# EAGLE board 10-19-21_LEDSubMatrixHighDensity (EAGLE 9.6.2)
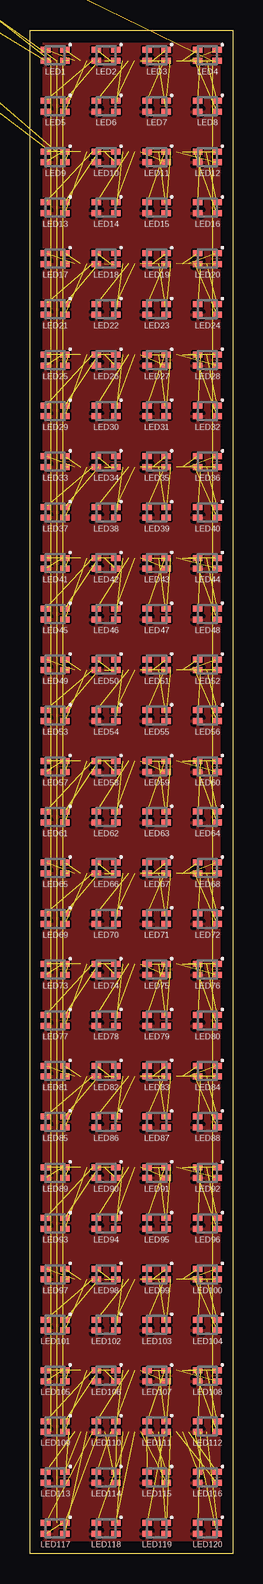
[diagram p0: board, top side]
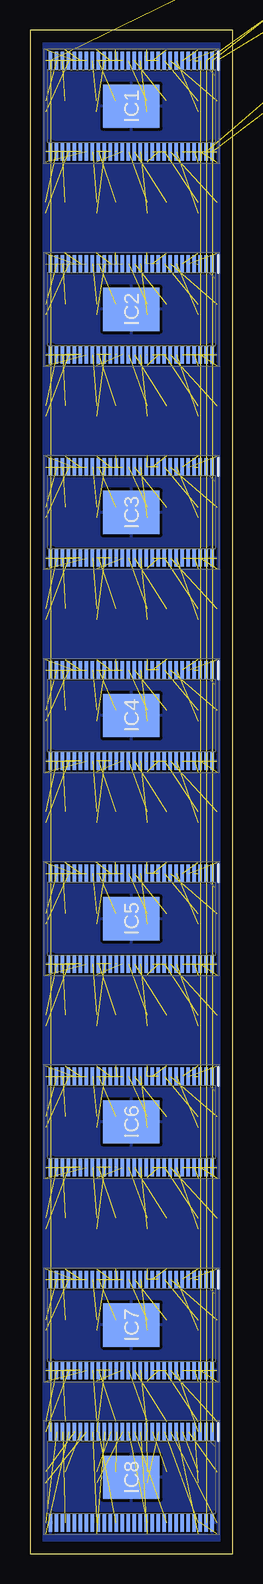
[diagram p1: board, bottom side, seen from below]

Size 16.93 x 127 mm. Coordinates in mm from the lower left corner, seen from the top.
Outline: 0,127 16.93,127 16.93,0 0,0 0,127
Copper layers (1+2*15+16): Top 0.035mm / dielectric 0.2mm / InnerTop 0.0175mm / dielectric 1.065mm / InnerBottom 0.0175mm / dielectric 0.2mm / Bottom 0.035mm
Design rules "default *": minimum track width 6mil, minimum drill 0.35mm, track to track 6mil, track to pad 6mil, pad to pad 6mil, via to via 6mil, smd to smd 6mil, copper to edge 40mil, drill to drill 6mil, minimum pad ring 10mil, minimum via ring 8mil, stop-mask expansion 4mil, vias tented up to drill 0mil, thermal gap 10mil

## Footprints (pad centres in the part's own frame; a part is rotated, then mirrored left to right if it is on the bottom)
SOP50P810X120-57N = smd 1.475 x 0.3: 1 -3.788,6.75; 2 -3.788,6.25; 3 -3.788,5.75; 4 -3.788,5.25; 5 -3.788,4.75; 6 -3.788,4.25; 7 -3.788,3.75; 8 -3.788,3.25; 9 -3.788,2.75; 10 -3.788,2.25; 11 -3.788,1.75; 12 -3.788,1.25; 13 -3.788,0.75; 14 -3.788,0.25; 15 -3.788,-0.25; 16 -3.788,-0.75; 17 -3.788,-1.25; 18 -3.788,-1.75; 19 -3.788,-2.25; 20 -3.788,-2.75; 21 -3.788,-3.25; 22 -3.788,-3.75; 23 -3.788,-4.25; 24 -3.788,-4.75; 25 -3.788,-5.25; 26 -3.788,-5.75; 27 -3.788,-6.25; 28 -3.788,-6.75; 29 3.788,-6.75; 30 3.788,-6.25; 31 3.788,-5.75; 32 3.788,-5.25; 33 3.788,-4.75; 34 3.788,-4.25; 35 3.788,-3.75; 36 3.788,-3.25; 37 3.788,-2.75; 38 3.788,-2.25; 39 3.788,-1.75; 40 3.788,-1.25; 41 3.788,-0.75; 42 3.788,-0.25; 43 3.788,0.25; 44 3.788,0.75; 45 3.788,1.25; 46 3.788,1.75; 47 3.788,2.25; 48 3.788,2.75; 49 3.788,3.25; 50 3.788,3.75; 51 3.788,4.25; 52 3.788,4.75; 53 3.788,5.25; 54 3.788,5.75; 55 3.788,6.25; 56 3.788,6.75 | smd 3.61 x 4.7: 57 0,0
B38G3RGB = smd 0.8 x 0.5: 1 0.8,0.45; 2 0.8,-0.45; 3 -0.8,-0.45; 4 -0.8,0.45
MA04-2 = drill 1.016 octagon: 1 -3.81,-1.27; 2 -3.81,1.27; 3 -1.27,-1.27; 4 -1.27,1.27; 5 1.27,-1.27; 6 1.27,1.27; 7 3.81,-1.27; 8 3.81,1.27

## Placement (x,y rotation side)
IC1  TLC5955DCAR  [SOP50P810X120-57N]  8.47,120.65 270 bottom
IC2  TLC5955DCAR  [SOP50P810X120-57N]  8.47,103.72 270 bottom
IC3  TLC5955DCAR  [SOP50P810X120-57N]  8.47,86.78 270 bottom
IC4  TLC5955DCAR  [SOP50P810X120-57N]  8.47,69.85 270 bottom
IC5  TLC5955DCAR  [SOP50P810X120-57N]  8.47,52.92 270 bottom
IC6  TLC5955DCAR  [SOP50P810X120-57N]  8.47,35.98 270 bottom
IC7  TLC5955DCAR  [SOP50P810X120-57N]  8.47,19.05 270 bottom
IC8  TLC5955DCAR  [SOP50P810X120-57N]  8.47,6.35 270 bottom
LED1  B38G3RGB  [B38G3RGB]  2.12,124.88 0 top
LED2  B38G3RGB  [B38G3RGB]  6.35,124.88 0 top
LED3  B38G3RGB  [B38G3RGB]  10.58,124.88 0 top
LED4  B38G3RGB  [B38G3RGB]  14.82,124.88 0 top
LED5  B38G3RGB  [B38G3RGB]  2.12,120.65 0 top
LED6  B38G3RGB  [B38G3RGB]  6.35,120.65 0 top
LED7  B38G3RGB  [B38G3RGB]  10.58,120.65 0 top
LED8  B38G3RGB  [B38G3RGB]  14.82,120.65 0 top
LED9  B38G3RGB  [B38G3RGB]  2.12,116.42 0 top
LED10  B38G3RGB  [B38G3RGB]  6.35,116.42 0 top
LED11  B38G3RGB  [B38G3RGB]  10.58,116.42 0 top
LED12  B38G3RGB  [B38G3RGB]  14.82,116.42 0 top
LED13  B38G3RGB  [B38G3RGB]  2.12,112.18 0 top
LED14  B38G3RGB  [B38G3RGB]  6.35,112.18 0 top
LED15  B38G3RGB  [B38G3RGB]  10.58,112.18 0 top
LED16  B38G3RGB  [B38G3RGB]  14.82,112.18 0 top
LED17  B38G3RGB  [B38G3RGB]  2.12,107.95 0 top
LED18  B38G3RGB  [B38G3RGB]  6.35,107.95 0 top
LED19  B38G3RGB  [B38G3RGB]  10.58,107.95 0 top
LED20  B38G3RGB  [B38G3RGB]  14.82,107.95 0 top
LED21  B38G3RGB  [B38G3RGB]  2.12,103.72 0 top
LED22  B38G3RGB  [B38G3RGB]  6.35,103.72 0 top
LED23  B38G3RGB  [B38G3RGB]  10.58,103.72 0 top
LED24  B38G3RGB  [B38G3RGB]  14.82,103.72 0 top
LED25  B38G3RGB  [B38G3RGB]  2.12,99.48 0 top
LED26  B38G3RGB  [B38G3RGB]  6.35,99.48 0 top
LED27  B38G3RGB  [B38G3RGB]  10.58,99.48 0 top
LED28  B38G3RGB  [B38G3RGB]  14.82,99.48 0 top
LED29  B38G3RGB  [B38G3RGB]  2.12,95.25 0 top
LED30  B38G3RGB  [B38G3RGB]  6.35,95.25 0 top
LED31  B38G3RGB  [B38G3RGB]  10.58,95.25 0 top
LED32  B38G3RGB  [B38G3RGB]  14.82,95.25 0 top
LED33  B38G3RGB  [B38G3RGB]  2.12,91.02 0 top
LED34  B38G3RGB  [B38G3RGB]  6.35,91.02 0 top
LED35  B38G3RGB  [B38G3RGB]  10.58,91.02 0 top
LED36  B38G3RGB  [B38G3RGB]  14.82,91.02 0 top
LED37  B38G3RGB  [B38G3RGB]  2.12,86.78 0 top
LED38  B38G3RGB  [B38G3RGB]  6.35,86.78 0 top
LED39  B38G3RGB  [B38G3RGB]  10.58,86.78 0 top
LED40  B38G3RGB  [B38G3RGB]  14.82,86.78 0 top
LED41  B38G3RGB  [B38G3RGB]  2.12,82.55 0 top
LED42  B38G3RGB  [B38G3RGB]  6.35,82.55 0 top
LED43  B38G3RGB  [B38G3RGB]  10.58,82.55 0 top
LED44  B38G3RGB  [B38G3RGB]  14.82,82.55 0 top
LED45  B38G3RGB  [B38G3RGB]  2.12,78.32 0 top
LED46  B38G3RGB  [B38G3RGB]  6.35,78.32 0 top
LED47  B38G3RGB  [B38G3RGB]  10.58,78.32 0 top
LED48  B38G3RGB  [B38G3RGB]  14.82,78.32 0 top
LED49  B38G3RGB  [B38G3RGB]  2.12,74.08 0 top
LED50  B38G3RGB  [B38G3RGB]  6.35,74.08 0 top
LED51  B38G3RGB  [B38G3RGB]  10.58,74.08 0 top
LED52  B38G3RGB  [B38G3RGB]  14.82,74.08 0 top
LED53  B38G3RGB  [B38G3RGB]  2.12,69.85 0 top
LED54  B38G3RGB  [B38G3RGB]  6.35,69.85 0 top
LED55  B38G3RGB  [B38G3RGB]  10.58,69.85 0 top
LED56  B38G3RGB  [B38G3RGB]  14.82,69.85 0 top
LED57  B38G3RGB  [B38G3RGB]  2.12,65.62 0 top
LED58  B38G3RGB  [B38G3RGB]  6.35,65.62 0 top
LED59  B38G3RGB  [B38G3RGB]  10.58,65.62 0 top
LED60  B38G3RGB  [B38G3RGB]  14.82,65.62 0 top
LED61  B38G3RGB  [B38G3RGB]  2.12,61.38 0 top
LED62  B38G3RGB  [B38G3RGB]  6.35,61.38 0 top
LED63  B38G3RGB  [B38G3RGB]  10.58,61.38 0 top
LED64  B38G3RGB  [B38G3RGB]  14.82,61.38 0 top
LED65  B38G3RGB  [B38G3RGB]  2.12,57.15 0 top
LED66  B38G3RGB  [B38G3RGB]  6.35,57.15 0 top
LED67  B38G3RGB  [B38G3RGB]  10.58,57.15 0 top
LED68  B38G3RGB  [B38G3RGB]  14.82,57.15 0 top
LED69  B38G3RGB  [B38G3RGB]  2.12,52.92 0 top
LED70  B38G3RGB  [B38G3RGB]  6.35,52.92 0 top
LED71  B38G3RGB  [B38G3RGB]  10.58,52.92 0 top
LED72  B38G3RGB  [B38G3RGB]  14.82,52.92 0 top
LED73  B38G3RGB  [B38G3RGB]  2.12,48.68 0 top
LED74  B38G3RGB  [B38G3RGB]  6.35,48.68 0 top
LED75  B38G3RGB  [B38G3RGB]  10.58,48.68 0 top
LED76  B38G3RGB  [B38G3RGB]  14.82,48.68 0 top
LED77  B38G3RGB  [B38G3RGB]  2.12,44.45 0 top
LED78  B38G3RGB  [B38G3RGB]  6.35,44.45 0 top
LED79  B38G3RGB  [B38G3RGB]  10.58,44.45 0 top
LED80  B38G3RGB  [B38G3RGB]  14.82,44.45 0 top
LED81  B38G3RGB  [B38G3RGB]  2.12,40.22 0 top
LED82  B38G3RGB  [B38G3RGB]  6.35,40.22 0 top
LED83  B38G3RGB  [B38G3RGB]  10.58,40.22 0 top
LED84  B38G3RGB  [B38G3RGB]  14.82,40.22 0 top
LED85  B38G3RGB  [B38G3RGB]  2.12,35.98 0 top
LED86  B38G3RGB  [B38G3RGB]  6.35,35.98 0 top
LED87  B38G3RGB  [B38G3RGB]  10.58,35.98 0 top
LED88  B38G3RGB  [B38G3RGB]  14.82,35.98 0 top
LED89  B38G3RGB  [B38G3RGB]  2.12,31.75 0 top
LED90  B38G3RGB  [B38G3RGB]  6.35,31.75 0 top
LED91  B38G3RGB  [B38G3RGB]  10.58,31.75 0 top
LED92  B38G3RGB  [B38G3RGB]  14.82,31.75 0 top
LED93  B38G3RGB  [B38G3RGB]  2.12,27.52 0 top
LED94  B38G3RGB  [B38G3RGB]  6.35,27.52 0 top
LED95  B38G3RGB  [B38G3RGB]  10.58,27.52 0 top
LED96  B38G3RGB  [B38G3RGB]  14.82,27.52 0 top
LED97  B38G3RGB  [B38G3RGB]  2.12,23.28 0 top
LED98  B38G3RGB  [B38G3RGB]  6.35,23.28 0 top
LED99  B38G3RGB  [B38G3RGB]  10.58,23.28 0 top
LED100  B38G3RGB  [B38G3RGB]  14.82,23.28 0 top
LED101  B38G3RGB  [B38G3RGB]  2.12,19.05 0 top
LED102  B38G3RGB  [B38G3RGB]  6.35,19.05 0 top
LED103  B38G3RGB  [B38G3RGB]  10.58,19.05 0 top
LED104  B38G3RGB  [B38G3RGB]  14.82,19.05 0 top
LED105  B38G3RGB  [B38G3RGB]  2.12,14.82 0 top
LED106  B38G3RGB  [B38G3RGB]  6.35,14.82 0 top
LED107  B38G3RGB  [B38G3RGB]  10.58,14.82 0 top
LED108  B38G3RGB  [B38G3RGB]  14.82,14.82 0 top
LED109  B38G3RGB  [B38G3RGB]  2.12,10.58 0 top
LED110  B38G3RGB  [B38G3RGB]  6.35,10.58 0 top
LED111  B38G3RGB  [B38G3RGB]  10.58,10.58 0 top
LED112  B38G3RGB  [B38G3RGB]  14.82,10.58 0 top
LED113  B38G3RGB  [B38G3RGB]  2.12,6.35 0 top
LED114  B38G3RGB  [B38G3RGB]  6.35,6.35 0 top
LED115  B38G3RGB  [B38G3RGB]  10.58,6.35 0 top
LED116  B38G3RGB  [B38G3RGB]  14.82,6.35 0 top
LED117  B38G3RGB  [B38G3RGB]  2.12,2.12 0 top
LED118  B38G3RGB  [B38G3RGB]  6.35,2.12 0 top
LED119  B38G3RGB  [B38G3RGB]  10.58,2.12 0 top
LED120  B38G3RGB  [B38G3RGB]  14.82,2.12 0 top
SV1  [MA04-2]  -33.02,147.32 0 top  (outside the outline)

## Library data of the parts
IC1-IC8 = TLC5955DCAR; ARROW_PART_NUMBER: TLC5955DCAR; ARROW_PRICE-STOCK: https://www.arrow.com/en/products/tlc5955dcar/texas-instruments; DESCRIPTION: 48ch, 16bit PWM LED Driver with Dot-Correction, Brightness Control, Open/Short Detection; HEIGHT: 1.2mm; MANUFACTURER_NAME: Texas Instruments; MANUFACTURER_PART_NUMBER: TLC5955DCAR; MOUSER_PART_NUMBER: 595-TLC5955DCAR; MOUSER_PRICE-STOCK: https://www.mouser.co.uk/ProductDetail/Texas-Instruments/TLC5955DCAR?qs=%2Fd%252BFzHvH4c3zo%2FeGYG5n7g%3D%3D
LED1-LED120 = B38G3RGB; ARROW_PART_NUMBER: SML-LX0606IGC-TR; ARROW_PRICE-STOCK: https://www.arrow.com/en/products/sml-lx0606igc-tr/lumex; DESCRIPTION: Standard LEDs - SMD Surface Mount LEDs; HEIGHT: 0.7mm; MANUFACTURER_NAME: Lumex; MANUFACTURER_PART_NUMBER: SML-LX0606IGC-TR; MOUSER_PART_NUMBER: 696-SML-0606IGCTR; MOUSER_PRICE-STOCK: https://www.mouser.co.uk/ProductDetail/Lumex/SML-LX0606IGC-TR?qs=I1ILoAvtKy%252BVd7WFwiUkZQ%3D%3D
SV1 = con-lstb; OC_FARNELL: unknown; OC_NEWARK: unknown

## Nets
3V3: IC1.54 IC2.54 IC3.54 IC4.54 IC5.54 IC6.54 IC7.54 IC8.54 LED1.3 LED2.3 LED3.3 LED4.3 LED5.3 LED6.3 LED7.3 LED8.3 LED9.3 LED10.3 LED11.3 LED12.3 LED13.3 LED14.3 LED15.3 LED16.3 LED17.3 LED18.3 LED19.3 LED20.3 LED21.3 LED22.3 LED23.3 LED24.3 LED25.3 LED26.3 LED27.3 LED28.3 LED29.3 LED30.3 LED31.3 LED32.3 LED33.3 LED34.3 LED35.3 LED36.3 LED37.3 LED38.3 LED39.3 LED40.3 LED41.3 LED42.3 LED43.3 LED44.3 LED45.3 LED46.3 LED47.3 LED48.3 LED49.3 LED50.3 LED51.3 LED52.3 LED53.3 LED54.3 LED55.3 LED56.3 LED57.3 LED58.3 LED59.3 LED60.3 LED61.3 LED62.3 LED63.3 LED64.3 LED65.3 LED66.3 LED67.3 LED68.3 LED69.3 LED70.3 LED71.3 LED72.3 LED73.3 LED74.3 LED75.3 LED76.3 LED77.3 LED78.3 LED79.3 LED80.3 LED81.3 LED82.3 LED83.3 LED84.3 LED85.3 LED86.3 LED87.3 LED88.3 LED89.3 LED90.3 LED91.3 LED92.3 LED93.3 LED94.3 LED95.3 LED96.3 LED97.3 LED98.3 LED99.3 LED100.3 LED101.3 LED102.3 LED103.3 LED104.3 LED105.3 LED106.3 LED107.3 LED108.3 LED109.3 LED110.3 LED111.3 LED112.3 LED113.3 LED114.3 LED115.3 LED116.3 LED117.3 LED118.3 LED119.3 LED120.3 SV1.3 SV1.4
GND: IC1.29 IC1.56 IC1.57 IC2.29 IC2.56 IC2.57 IC3.29 IC3.56 IC3.57 IC4.29 IC4.56 IC4.57 IC5.29 IC5.56 IC5.57 IC6.29 IC6.56 IC6.57 IC7.29 IC7.56 IC7.57 IC8.29 IC8.56 IC8.57 SV1.1 SV1.2
GSCLK: IC1.55 IC2.55 IC3.55 IC4.55 IC5.55 IC6.55 IC7.55 IC8.55 SV1.5
LAT: IC1.3 IC2.3 IC3.3 IC4.3 IC5.3 IC6.3 IC7.3 IC8.3
N$352: IC8.53
N$353: IC8.52
N$354: IC8.51
N$355: IC8.50
N$356: IC8.49
N$357: IC8.48
N$358: IC8.47
N$359: IC8.46
N$360: IC8.45
N$361: IC8.44
N$362: IC8.43
N$363: IC8.42
N$364: IC8.41
N$365: IC8.40
N$366: IC8.39
N$367: IC8.38
N$368: IC8.37
N$369: IC8.36
N$370: IC8.35
N$371: IC8.34
N$372: IC8.33
N$373: IC8.32
N$374: IC8.31
N$375: IC8.30
N$LEDB1_IC1_PIN4: IC1.4 LED1.2
N$LEDB2_IC1_PIN10: IC1.10 LED2.2
N$LEDB3_IC1_PIN16: IC1.16 LED3.2
N$LEDB4_IC1_PIN22: IC1.22 LED4.2
N$LEDB5_IC1_PIN7: IC1.7 LED5.2
N$LEDB6_IC1_PIN13: IC1.13 LED6.2
N$LEDB7_IC1_PIN19: IC1.19 LED7.2
N$LEDB8_IC1_PIN25: IC1.25 LED8.2
N$LEDB9_IC1_PIN53: IC1.53 LED9.2
N$LEDB10_IC1_PIN47: IC1.47 LED10.2
N$LEDB11_IC1_PIN41: IC1.41 LED11.2
N$LEDB12_IC1_PIN35: IC1.35 LED12.2
N$LEDB13_IC1_PIN50: IC1.50 LED13.2
N$LEDB14_IC1_PIN44: IC1.44 LED14.2
N$LEDB15_IC1_PIN38: IC1.38 LED15.2
N$LEDB16_IC1_PIN32: IC1.32 LED16.2
N$LEDB17_IC2_PIN4: IC2.4 LED17.2
N$LEDB18_IC2_PIN10: IC2.10 LED18.2
N$LEDB19_IC2_PIN16: IC2.16 LED19.2
N$LEDB20_IC2_PIN22: IC2.22 LED20.2
N$LEDB21_IC2_PIN7: IC2.7 LED21.2
N$LEDB22_IC2_PIN13: IC2.13 LED22.2
N$LEDB23_IC2_PIN19: IC2.19 LED23.2
N$LEDB24_IC2_PIN25: IC2.25 LED24.2
N$LEDB25_IC2_PIN53: IC2.53 LED25.2
N$LEDB26_IC2_PIN47: IC2.47 LED26.2
N$LEDB27_IC2_PIN41: IC2.41 LED27.2
N$LEDB28_IC2_PIN35: IC2.35 LED28.2
N$LEDB29_IC2_PIN50: IC2.50 LED29.2
N$LEDB30_IC2_PIN44: IC2.44 LED30.2
N$LEDB31_IC2_PIN38: IC2.38 LED31.2
N$LEDB32_IC2_PIN32: IC2.32 LED32.2
N$LEDB33_IC3_PIN4: IC3.4 LED33.2
N$LEDB34_IC3_PIN10: IC3.10 LED34.2
N$LEDB35_IC3_PIN16: IC3.16 LED35.2
N$LEDB36_IC3_PIN22: IC3.22 LED36.2
N$LEDB37_IC3_PIN7: IC3.7 LED37.2
N$LEDB38_IC3_PIN13: IC3.13 LED38.2
N$LEDB39_IC3_PIN19: IC3.19 LED39.2
N$LEDB40_IC3_PIN25: IC3.25 LED40.2
N$LEDB41_IC3_PIN53: IC3.53 LED41.2
N$LEDB42_IC3_PIN47: IC3.47 LED42.2
N$LEDB43_IC3_PIN41: IC3.41 LED43.2
N$LEDB44_IC3_PIN35: IC3.35 LED44.2
N$LEDB45_IC3_PIN50: IC3.50 LED45.2
N$LEDB46_IC3_PIN44: IC3.44 LED46.2
N$LEDB47_IC3_PIN38: IC3.38 LED47.2
N$LEDB48_IC3_PIN32: IC3.32 LED48.2
N$LEDB49_IC4_PIN4: IC4.4 LED49.2
N$LEDB50_IC4_PIN10: IC4.10 LED50.2
N$LEDB51_IC4_PIN16: IC4.16 LED51.2
N$LEDB52_IC4_PIN22: IC4.22 LED52.2
N$LEDB53_IC4_PIN7: IC4.7 LED53.2
N$LEDB54_IC4_PIN13: IC4.13 LED54.2
N$LEDB55_IC4_PIN19: IC4.19 LED55.2
N$LEDB56_IC4_PIN25: IC4.25 LED56.2
N$LEDB57_IC4_PIN53: IC4.53 LED57.2
N$LEDB58_IC4_PIN47: IC4.47 LED58.2
N$LEDB59_IC4_PIN41: IC4.41 LED59.2
N$LEDB60_IC4_PIN35: IC4.35 LED60.2
N$LEDB61_IC4_PIN50: IC4.50 LED61.2
N$LEDB62_IC4_PIN44: IC4.44 LED62.2
N$LEDB63_IC4_PIN38: IC4.38 LED63.2
N$LEDB64_IC4_PIN32: IC4.32 LED64.2
N$LEDB65_IC5_PIN4: IC5.4 LED65.2
N$LEDB66_IC5_PIN10: IC5.10 LED66.2
N$LEDB67_IC5_PIN16: IC5.16 LED67.2
N$LEDB68_IC5_PIN22: IC5.22 LED68.2
N$LEDB69_IC5_PIN7: IC5.7 LED69.2
N$LEDB70_IC5_PIN13: IC5.13 LED70.2
N$LEDB71_IC5_PIN19: IC5.19 LED71.2
N$LEDB72_IC5_PIN25: IC5.25 LED72.2
N$LEDB73_IC5_PIN53: IC5.53 LED73.2
N$LEDB74_IC5_PIN47: IC5.47 LED74.2
N$LEDB75_IC5_PIN41: IC5.41 LED75.2
N$LEDB76_IC5_PIN35: IC5.35 LED76.2
N$LEDB77_IC5_PIN50: IC5.50 LED77.2
N$LEDB78_IC5_PIN44: IC5.44 LED78.2
N$LEDB79_IC5_PIN38: IC5.38 LED79.2
N$LEDB80_IC5_PIN32: IC5.32 LED80.2
N$LEDB81_IC6_PIN4: IC6.4 LED81.2
N$LEDB82_IC6_PIN10: IC6.10 LED82.2
N$LEDB83_IC6_PIN16: IC6.16 LED83.2
N$LEDB84_IC6_PIN22: IC6.22 LED84.2
N$LEDB85_IC6_PIN7: IC6.7 LED85.2
N$LEDB86_IC6_PIN13: IC6.13 LED86.2
N$LEDB87_IC6_PIN19: IC6.19 LED87.2
N$LEDB88_IC6_PIN25: IC6.25 LED88.2
N$LEDB89_IC6_PIN53: IC6.53 LED89.2
N$LEDB90_IC6_PIN47: IC6.47 LED90.2
N$LEDB91_IC6_PIN41: IC6.41 LED91.2
N$LEDB92_IC6_PIN35: IC6.35 LED92.2
N$LEDB93_IC6_PIN50: IC6.50 LED93.2
N$LEDB94_IC6_PIN44: IC6.44 LED94.2
N$LEDB95_IC6_PIN38: IC6.38 LED95.2
N$LEDB96_IC6_PIN32: IC6.32 LED96.2
N$LEDB97_IC7_PIN4: IC7.4 LED97.2
N$LEDB98_IC7_PIN10: IC7.10 LED98.2
N$LEDB99_IC7_PIN16: IC7.16 LED99.2
N$LEDB100_IC7_PIN22: IC7.22 LED100.2
N$LEDB101_IC7_PIN7: IC7.7 LED101.2
N$LEDB102_IC7_PIN13: IC7.13 LED102.2
N$LEDB103_IC7_PIN19: IC7.19 LED103.2
N$LEDB104_IC7_PIN25: IC7.25 LED104.2
N$LEDB105_IC7_PIN53: IC7.53 LED105.2
N$LEDB106_IC7_PIN47: IC7.47 LED106.2
N$LEDB107_IC7_PIN41: IC7.41 LED107.2
N$LEDB108_IC7_PIN35: IC7.35 LED108.2
N$LEDB109_IC7_PIN50: IC7.50 LED109.2
N$LEDB110_IC7_PIN44: IC7.44 LED110.2
N$LEDB111_IC7_PIN38: IC7.38 LED111.2
N$LEDB112_IC7_PIN32: IC7.32 LED112.2
N$LEDB113_IC8_PIN4: IC8.4 LED113.2
N$LEDB114_IC8_PIN10: IC8.10 LED114.2
N$LEDB115_IC8_PIN16: IC8.16 LED115.2
N$LEDB116_IC8_PIN22: IC8.22 LED116.2
N$LEDB117_IC8_PIN7: IC8.7 LED117.2
N$LEDB118_IC8_PIN13: IC8.13 LED118.2
N$LEDB119_IC8_PIN19: IC8.19 LED119.2
N$LEDB120_IC8_PIN25: IC8.25 LED120.2
N$LEDG1_IC1_PIN6: IC1.6 LED1.1
N$LEDG2_IC1_PIN12: IC1.12 LED2.1
N$LEDG3_IC1_PIN18: IC1.18 LED3.1
N$LEDG4_IC1_PIN24: IC1.24 LED4.1
N$LEDG5_IC1_PIN9: IC1.9 LED5.1
N$LEDG6_IC1_PIN15: IC1.15 LED6.1
N$LEDG7_IC1_PIN21: IC1.21 LED7.1
N$LEDG8_IC1_PIN27: IC1.27 LED8.1
N$LEDG9_IC1_PIN51: IC1.51 LED9.1
N$LEDG10_IC1_PIN45: IC1.45 LED10.1
N$LEDG11_IC1_PIN39: IC1.39 LED11.1
N$LEDG12_IC1_PIN33: IC1.33 LED12.1
N$LEDG13_IC1_PIN48: IC1.48 LED13.1
N$LEDG14_IC1_PIN42: IC1.42 LED14.1
N$LEDG15_IC1_PIN36: IC1.36 LED15.1
N$LEDG16_IC1_PIN30: IC1.30 LED16.1
N$LEDG17_IC2_PIN6: IC2.6 LED17.1
N$LEDG18_IC2_PIN12: IC2.12 LED18.1
N$LEDG19_IC2_PIN18: IC2.18 LED19.1
N$LEDG20_IC2_PIN24: IC2.24 LED20.1
N$LEDG21_IC2_PIN9: IC2.9 LED21.1
N$LEDG22_IC2_PIN15: IC2.15 LED22.1
N$LEDG23_IC2_PIN21: IC2.21 LED23.1
N$LEDG24_IC2_PIN27: IC2.27 LED24.1
N$LEDG25_IC2_PIN51: IC2.51 LED25.1
N$LEDG26_IC2_PIN45: IC2.45 LED26.1
N$LEDG27_IC2_PIN39: IC2.39 LED27.1
N$LEDG28_IC2_PIN33: IC2.33 LED28.1
N$LEDG29_IC2_PIN48: IC2.48 LED29.1
N$LEDG30_IC2_PIN42: IC2.42 LED30.1
N$LEDG31_IC2_PIN36: IC2.36 LED31.1
N$LEDG32_IC2_PIN30: IC2.30 LED32.1
N$LEDG33_IC3_PIN6: IC3.6 LED33.1
N$LEDG34_IC3_PIN12: IC3.12 LED34.1
N$LEDG35_IC3_PIN18: IC3.18 LED35.1
N$LEDG36_IC3_PIN24: IC3.24 LED36.1
N$LEDG37_IC3_PIN9: IC3.9 LED37.1
N$LEDG38_IC3_PIN15: IC3.15 LED38.1
N$LEDG39_IC3_PIN21: IC3.21 LED39.1
N$LEDG40_IC3_PIN27: IC3.27 LED40.1
N$LEDG41_IC3_PIN51: IC3.51 LED41.1
N$LEDG42_IC3_PIN45: IC3.45 LED42.1
N$LEDG43_IC3_PIN39: IC3.39 LED43.1
N$LEDG44_IC3_PIN33: IC3.33 LED44.1
N$LEDG45_IC3_PIN48: IC3.48 LED45.1
N$LEDG46_IC3_PIN42: IC3.42 LED46.1
N$LEDG47_IC3_PIN36: IC3.36 LED47.1
N$LEDG48_IC3_PIN30: IC3.30 LED48.1
N$LEDG49_IC4_PIN6: IC4.6 LED49.1
N$LEDG50_IC4_PIN12: IC4.12 LED50.1
N$LEDG51_IC4_PIN18: IC4.18 LED51.1
N$LEDG52_IC4_PIN24: IC4.24 LED52.1
N$LEDG53_IC4_PIN9: IC4.9 LED53.1
N$LEDG54_IC4_PIN15: IC4.15 LED54.1
N$LEDG55_IC4_PIN21: IC4.21 LED55.1
N$LEDG56_IC4_PIN27: IC4.27 LED56.1
N$LEDG57_IC4_PIN51: IC4.51 LED57.1
N$LEDG58_IC4_PIN45: IC4.45 LED58.1
N$LEDG59_IC4_PIN39: IC4.39 LED59.1
N$LEDG60_IC4_PIN33: IC4.33 LED60.1
N$LEDG61_IC4_PIN48: IC4.48 LED61.1
N$LEDG62_IC4_PIN42: IC4.42 LED62.1
N$LEDG63_IC4_PIN36: IC4.36 LED63.1
N$LEDG64_IC4_PIN30: IC4.30 LED64.1
N$LEDG65_IC5_PIN6: IC5.6 LED65.1
N$LEDG66_IC5_PIN12: IC5.12 LED66.1
N$LEDG67_IC5_PIN18: IC5.18 LED67.1
N$LEDG68_IC5_PIN24: IC5.24 LED68.1
N$LEDG69_IC5_PIN9: IC5.9 LED69.1
N$LEDG70_IC5_PIN15: IC5.15 LED70.1
N$LEDG71_IC5_PIN21: IC5.21 LED71.1
N$LEDG72_IC5_PIN27: IC5.27 LED72.1
N$LEDG73_IC5_PIN51: IC5.51 LED73.1
N$LEDG74_IC5_PIN45: IC5.45 LED74.1
N$LEDG75_IC5_PIN39: IC5.39 LED75.1
N$LEDG76_IC5_PIN33: IC5.33 LED76.1
N$LEDG77_IC5_PIN48: IC5.48 LED77.1
N$LEDG78_IC5_PIN42: IC5.42 LED78.1
N$LEDG79_IC5_PIN36: IC5.36 LED79.1
N$LEDG80_IC5_PIN30: IC5.30 LED80.1
N$LEDG81_IC6_PIN6: IC6.6 LED81.1
N$LEDG82_IC6_PIN12: IC6.12 LED82.1
N$LEDG83_IC6_PIN18: IC6.18 LED83.1
N$LEDG84_IC6_PIN24: IC6.24 LED84.1
N$LEDG85_IC6_PIN9: IC6.9 LED85.1
N$LEDG86_IC6_PIN15: IC6.15 LED86.1
N$LEDG87_IC6_PIN21: IC6.21 LED87.1
N$LEDG88_IC6_PIN27: IC6.27 LED88.1
N$LEDG89_IC6_PIN51: IC6.51 LED89.1
N$LEDG90_IC6_PIN45: IC6.45 LED90.1
N$LEDG91_IC6_PIN39: IC6.39 LED91.1
N$LEDG92_IC6_PIN33: IC6.33 LED92.1
N$LEDG93_IC6_PIN48: IC6.48 LED93.1
N$LEDG94_IC6_PIN42: IC6.42 LED94.1
N$LEDG95_IC6_PIN36: IC6.36 LED95.1
N$LEDG96_IC6_PIN30: IC6.30 LED96.1
N$LEDG97_IC7_PIN6: IC7.6 LED97.1
N$LEDG98_IC7_PIN12: IC7.12 LED98.1
N$LEDG99_IC7_PIN18: IC7.18 LED99.1
N$LEDG100_IC7_PIN24: IC7.24 LED100.1
N$LEDG101_IC7_PIN9: IC7.9 LED101.1
N$LEDG102_IC7_PIN15: IC7.15 LED102.1
N$LEDG103_IC7_PIN21: IC7.21 LED103.1
N$LEDG104_IC7_PIN27: IC7.27 LED104.1
N$LEDG105_IC7_PIN51: IC7.51 LED105.1
N$LEDG106_IC7_PIN45: IC7.45 LED106.1
N$LEDG107_IC7_PIN39: IC7.39 LED107.1
N$LEDG108_IC7_PIN33: IC7.33 LED108.1
N$LEDG109_IC7_PIN48: IC7.48 LED109.1
N$LEDG110_IC7_PIN42: IC7.42 LED110.1
N$LEDG111_IC7_PIN36: IC7.36 LED111.1
N$LEDG112_IC7_PIN30: IC7.30 LED112.1
N$LEDG113_IC8_PIN6: IC8.6 LED113.1
N$LEDG114_IC8_PIN12: IC8.12 LED114.1
N$LEDG115_IC8_PIN18: IC8.18 LED115.1
N$LEDG116_IC8_PIN24: IC8.24 LED116.1
N$LEDG117_IC8_PIN9: IC8.9 LED117.1
N$LEDG118_IC8_PIN15: IC8.15 LED118.1
N$LEDG119_IC8_PIN21: IC8.21 LED119.1
N$LEDG120_IC8_PIN27: IC8.27 LED120.1
N$LEDR1_IC1_PIN5: IC1.5 LED1.4
N$LEDR2_IC1_PIN11: IC1.11 LED2.4
N$LEDR3_IC1_PIN17: IC1.17 LED3.4
N$LEDR4_IC1_PIN23: IC1.23 LED4.4
N$LEDR5_IC1_PIN8: IC1.8 LED5.4
N$LEDR6_IC1_PIN14: IC1.14 LED6.4
N$LEDR7_IC1_PIN20: IC1.20 LED7.4
N$LEDR8_IC1_PIN26: IC1.26 LED8.4
N$LEDR9_IC1_PIN52: IC1.52 LED9.4
N$LEDR10_IC1_PIN46: IC1.46 LED10.4
N$LEDR11_IC1_PIN40: IC1.40 LED11.4
N$LEDR12_IC1_PIN34: IC1.34 LED12.4
N$LEDR13_IC1_PIN49: IC1.49 LED13.4
N$LEDR14_IC1_PIN43: IC1.43 LED14.4
N$LEDR15_IC1_PIN37: IC1.37 LED15.4
N$LEDR16_IC1_PIN31: IC1.31 LED16.4
N$LEDR17_IC2_PIN5: IC2.5 LED17.4
N$LEDR18_IC2_PIN11: IC2.11 LED18.4
N$LEDR19_IC2_PIN17: IC2.17 LED19.4
N$LEDR20_IC2_PIN23: IC2.23 LED20.4
N$LEDR21_IC2_PIN8: IC2.8 LED21.4
N$LEDR22_IC2_PIN14: IC2.14 LED22.4
N$LEDR23_IC2_PIN20: IC2.20 LED23.4
N$LEDR24_IC2_PIN26: IC2.26 LED24.4
N$LEDR25_IC2_PIN52: IC2.52 LED25.4
N$LEDR26_IC2_PIN46: IC2.46 LED26.4
N$LEDR27_IC2_PIN40: IC2.40 LED27.4
N$LEDR28_IC2_PIN34: IC2.34 LED28.4
N$LEDR29_IC2_PIN49: IC2.49 LED29.4
N$LEDR30_IC2_PIN43: IC2.43 LED30.4
N$LEDR31_IC2_PIN37: IC2.37 LED31.4
N$LEDR32_IC2_PIN31: IC2.31 LED32.4
N$LEDR33_IC3_PIN5: IC3.5 LED33.4
N$LEDR34_IC3_PIN11: IC3.11 LED34.4
N$LEDR35_IC3_PIN17: IC3.17 LED35.4
N$LEDR36_IC3_PIN23: IC3.23 LED36.4
N$LEDR37_IC3_PIN8: IC3.8 LED37.4
N$LEDR38_IC3_PIN14: IC3.14 LED38.4
N$LEDR39_IC3_PIN20: IC3.20 LED39.4
N$LEDR40_IC3_PIN26: IC3.26 LED40.4
N$LEDR41_IC3_PIN52: IC3.52 LED41.4
N$LEDR42_IC3_PIN46: IC3.46 LED42.4
N$LEDR43_IC3_PIN40: IC3.40 LED43.4
N$LEDR44_IC3_PIN34: IC3.34 LED44.4
N$LEDR45_IC3_PIN49: IC3.49 LED45.4
N$LEDR46_IC3_PIN43: IC3.43 LED46.4
N$LEDR47_IC3_PIN37: IC3.37 LED47.4
N$LEDR48_IC3_PIN31: IC3.31 LED48.4
N$LEDR49_IC4_PIN5: IC4.5 LED49.4
N$LEDR50_IC4_PIN11: IC4.11 LED50.4
N$LEDR51_IC4_PIN17: IC4.17 LED51.4
N$LEDR52_IC4_PIN23: IC4.23 LED52.4
N$LEDR53_IC4_PIN8: IC4.8 LED53.4
N$LEDR54_IC4_PIN14: IC4.14 LED54.4
N$LEDR55_IC4_PIN20: IC4.20 LED55.4
N$LEDR56_IC4_PIN26: IC4.26 LED56.4
N$LEDR57_IC4_PIN52: IC4.52 LED57.4
N$LEDR58_IC4_PIN46: IC4.46 LED58.4
N$LEDR59_IC4_PIN40: IC4.40 LED59.4
N$LEDR60_IC4_PIN34: IC4.34 LED60.4
N$LEDR61_IC4_PIN49: IC4.49 LED61.4
N$LEDR62_IC4_PIN43: IC4.43 LED62.4
N$LEDR63_IC4_PIN37: IC4.37 LED63.4
N$LEDR64_IC4_PIN31: IC4.31 LED64.4
N$LEDR65_IC5_PIN5: IC5.5 LED65.4
N$LEDR66_IC5_PIN11: IC5.11 LED66.4
N$LEDR67_IC5_PIN17: IC5.17 LED67.4
N$LEDR68_IC5_PIN23: IC5.23 LED68.4
N$LEDR69_IC5_PIN8: IC5.8 LED69.4
N$LEDR70_IC5_PIN14: IC5.14 LED70.4
N$LEDR71_IC5_PIN20: IC5.20 LED71.4
N$LEDR72_IC5_PIN26: IC5.26 LED72.4
N$LEDR73_IC5_PIN52: IC5.52 LED73.4
N$LEDR74_IC5_PIN46: IC5.46 LED74.4
N$LEDR75_IC5_PIN40: IC5.40 LED75.4
N$LEDR76_IC5_PIN34: IC5.34 LED76.4
N$LEDR77_IC5_PIN49: IC5.49 LED77.4
N$LEDR78_IC5_PIN43: IC5.43 LED78.4
N$LEDR79_IC5_PIN37: IC5.37 LED79.4
N$LEDR80_IC5_PIN31: IC5.31 LED80.4
N$LEDR81_IC6_PIN5: IC6.5 LED81.4
N$LEDR82_IC6_PIN11: IC6.11 LED82.4
N$LEDR83_IC6_PIN17: IC6.17 LED83.4
N$LEDR84_IC6_PIN23: IC6.23 LED84.4
N$LEDR85_IC6_PIN8: IC6.8 LED85.4
N$LEDR86_IC6_PIN14: IC6.14 LED86.4
N$LEDR87_IC6_PIN20: IC6.20 LED87.4
N$LEDR88_IC6_PIN26: IC6.26 LED88.4
N$LEDR89_IC6_PIN52: IC6.52 LED89.4
N$LEDR90_IC6_PIN46: IC6.46 LED90.4
N$LEDR91_IC6_PIN40: IC6.40 LED91.4
N$LEDR92_IC6_PIN34: IC6.34 LED92.4
N$LEDR93_IC6_PIN49: IC6.49 LED93.4
N$LEDR94_IC6_PIN43: IC6.43 LED94.4
N$LEDR95_IC6_PIN37: IC6.37 LED95.4
N$LEDR96_IC6_PIN31: IC6.31 LED96.4
N$LEDR97_IC7_PIN5: IC7.5 LED97.4
N$LEDR98_IC7_PIN11: IC7.11 LED98.4
N$LEDR99_IC7_PIN17: IC7.17 LED99.4
N$LEDR100_IC7_PIN23: IC7.23 LED100.4
N$LEDR101_IC7_PIN8: IC7.8 LED101.4
N$LEDR102_IC7_PIN14: IC7.14 LED102.4
N$LEDR103_IC7_PIN20: IC7.20 LED103.4
N$LEDR104_IC7_PIN26: IC7.26 LED104.4
N$LEDR105_IC7_PIN52: IC7.52 LED105.4
N$LEDR106_IC7_PIN46: IC7.46 LED106.4
N$LEDR107_IC7_PIN40: IC7.40 LED107.4
N$LEDR108_IC7_PIN34: IC7.34 LED108.4
N$LEDR109_IC7_PIN49: IC7.49 LED109.4
N$LEDR110_IC7_PIN43: IC7.43 LED110.4
N$LEDR111_IC7_PIN37: IC7.37 LED111.4
N$LEDR112_IC7_PIN31: IC7.31 LED112.4
N$LEDR113_IC8_PIN5: IC8.5 LED113.4
N$LEDR114_IC8_PIN11: IC8.11 LED114.4
N$LEDR115_IC8_PIN17: IC8.17 LED115.4
N$LEDR116_IC8_PIN23: IC8.23 LED116.4
N$LEDR117_IC8_PIN8: IC8.8 LED117.4
N$LEDR118_IC8_PIN14: IC8.14 LED118.4
N$LEDR119_IC8_PIN20: IC8.20 LED119.4
N$LEDR120_IC8_PIN26: IC8.26 LED120.4
SCLK: IC1.2 IC2.2 IC3.2 IC4.2 IC5.2 IC6.2 IC7.2 IC8.2 SV1.6
SIN_MCU: IC1.1 IC2.1 IC3.1 IC4.1 IC5.1 IC6.1 IC7.1 IC8.1 SV1.8
SOUT1: IC1.28 IC2.28 IC3.28 IC4.28 IC5.28 IC6.28 IC7.28 IC8.28 SV1.7

## Tracks (layer width: path | path; a pad name or v marks a point on that pad's centre or on a via)
3V3  (10 unrouted)
  pour Top: -20,147 40,147 40,-13 -20,-13
GND  (2 unrouted)
  pour Bottom: -20,147 40,147 40,-13 -20,-13
GSCLK  (8 unrouted)
LAT  (7 unrouted)
N$LEDB1_IC1_PIN4  (1 unrouted)
N$LEDB2_IC1_PIN10  (1 unrouted)
N$LEDB3_IC1_PIN16  (1 unrouted)
N$LEDB4_IC1_PIN22  (1 unrouted)
N$LEDB5_IC1_PIN7  (1 unrouted)
N$LEDB6_IC1_PIN13  (1 unrouted)
N$LEDB7_IC1_PIN19  (1 unrouted)
N$LEDB8_IC1_PIN25  (1 unrouted)
N$LEDB9_IC1_PIN53  (1 unrouted)
N$LEDB10_IC1_PIN47  (1 unrouted)
N$LEDB11_IC1_PIN41  (1 unrouted)
N$LEDB12_IC1_PIN35  (1 unrouted)
N$LEDB13_IC1_PIN50  (1 unrouted)
N$LEDB14_IC1_PIN44  (1 unrouted)
N$LEDB15_IC1_PIN38  (1 unrouted)
N$LEDB16_IC1_PIN32  (1 unrouted)
N$LEDB17_IC2_PIN4  (1 unrouted)
N$LEDB18_IC2_PIN10  (1 unrouted)
N$LEDB19_IC2_PIN16  (1 unrouted)
N$LEDB20_IC2_PIN22  (1 unrouted)
N$LEDB21_IC2_PIN7  (1 unrouted)
N$LEDB22_IC2_PIN13  (1 unrouted)
N$LEDB23_IC2_PIN19  (1 unrouted)
N$LEDB24_IC2_PIN25  (1 unrouted)
N$LEDB25_IC2_PIN53  (1 unrouted)
N$LEDB26_IC2_PIN47  (1 unrouted)
N$LEDB27_IC2_PIN41  (1 unrouted)
N$LEDB28_IC2_PIN35  (1 unrouted)
N$LEDB29_IC2_PIN50  (1 unrouted)
N$LEDB30_IC2_PIN44  (1 unrouted)
N$LEDB31_IC2_PIN38  (1 unrouted)
N$LEDB32_IC2_PIN32  (1 unrouted)
N$LEDB33_IC3_PIN4  (1 unrouted)
N$LEDB34_IC3_PIN10  (1 unrouted)
N$LEDB35_IC3_PIN16  (1 unrouted)
N$LEDB36_IC3_PIN22  (1 unrouted)
N$LEDB37_IC3_PIN7  (1 unrouted)
N$LEDB38_IC3_PIN13  (1 unrouted)
N$LEDB39_IC3_PIN19  (1 unrouted)
N$LEDB40_IC3_PIN25  (1 unrouted)
N$LEDB41_IC3_PIN53  (1 unrouted)
N$LEDB42_IC3_PIN47  (1 unrouted)
N$LEDB43_IC3_PIN41  (1 unrouted)
N$LEDB44_IC3_PIN35  (1 unrouted)
N$LEDB45_IC3_PIN50  (1 unrouted)
N$LEDB46_IC3_PIN44  (1 unrouted)
N$LEDB47_IC3_PIN38  (1 unrouted)
N$LEDB48_IC3_PIN32  (1 unrouted)
N$LEDB49_IC4_PIN4  (1 unrouted)
N$LEDB50_IC4_PIN10  (1 unrouted)
N$LEDB51_IC4_PIN16  (1 unrouted)
N$LEDB52_IC4_PIN22  (1 unrouted)
N$LEDB53_IC4_PIN7  (1 unrouted)
N$LEDB54_IC4_PIN13  (1 unrouted)
N$LEDB55_IC4_PIN19  (1 unrouted)
N$LEDB56_IC4_PIN25  (1 unrouted)
N$LEDB57_IC4_PIN53  (1 unrouted)
N$LEDB58_IC4_PIN47  (1 unrouted)
N$LEDB59_IC4_PIN41  (1 unrouted)
N$LEDB60_IC4_PIN35  (1 unrouted)
N$LEDB61_IC4_PIN50  (1 unrouted)
N$LEDB62_IC4_PIN44  (1 unrouted)
N$LEDB63_IC4_PIN38  (1 unrouted)
N$LEDB64_IC4_PIN32  (1 unrouted)
N$LEDB65_IC5_PIN4  (1 unrouted)
N$LEDB66_IC5_PIN10  (1 unrouted)
N$LEDB67_IC5_PIN16  (1 unrouted)
N$LEDB68_IC5_PIN22  (1 unrouted)
N$LEDB69_IC5_PIN7  (1 unrouted)
N$LEDB70_IC5_PIN13  (1 unrouted)
N$LEDB71_IC5_PIN19  (1 unrouted)
N$LEDB72_IC5_PIN25  (1 unrouted)
N$LEDB73_IC5_PIN53  (1 unrouted)
N$LEDB74_IC5_PIN47  (1 unrouted)
N$LEDB75_IC5_PIN41  (1 unrouted)
N$LEDB76_IC5_PIN35  (1 unrouted)
N$LEDB77_IC5_PIN50  (1 unrouted)
N$LEDB78_IC5_PIN44  (1 unrouted)
N$LEDB79_IC5_PIN38  (1 unrouted)
N$LEDB80_IC5_PIN32  (1 unrouted)
N$LEDB81_IC6_PIN4  (1 unrouted)
N$LEDB82_IC6_PIN10  (1 unrouted)
N$LEDB83_IC6_PIN16  (1 unrouted)
N$LEDB84_IC6_PIN22  (1 unrouted)
N$LEDB85_IC6_PIN7  (1 unrouted)
N$LEDB86_IC6_PIN13  (1 unrouted)
N$LEDB87_IC6_PIN19  (1 unrouted)
N$LEDB88_IC6_PIN25  (1 unrouted)
N$LEDB89_IC6_PIN53  (1 unrouted)
N$LEDB90_IC6_PIN47  (1 unrouted)
N$LEDB91_IC6_PIN41  (1 unrouted)
N$LEDB92_IC6_PIN35  (1 unrouted)
N$LEDB93_IC6_PIN50  (1 unrouted)
N$LEDB94_IC6_PIN44  (1 unrouted)
N$LEDB95_IC6_PIN38  (1 unrouted)
N$LEDB96_IC6_PIN32  (1 unrouted)
N$LEDB97_IC7_PIN4  (1 unrouted)
N$LEDB98_IC7_PIN10  (1 unrouted)
N$LEDB99_IC7_PIN16  (1 unrouted)
N$LEDB100_IC7_PIN22  (1 unrouted)
N$LEDB101_IC7_PIN7  (1 unrouted)
N$LEDB102_IC7_PIN13  (1 unrouted)
N$LEDB103_IC7_PIN19  (1 unrouted)
N$LEDB104_IC7_PIN25  (1 unrouted)
N$LEDB105_IC7_PIN53  (1 unrouted)
N$LEDB106_IC7_PIN47  (1 unrouted)
N$LEDB107_IC7_PIN41  (1 unrouted)
N$LEDB108_IC7_PIN35  (1 unrouted)
N$LEDB109_IC7_PIN50  (1 unrouted)
N$LEDB110_IC7_PIN44  (1 unrouted)
N$LEDB111_IC7_PIN38  (1 unrouted)
N$LEDB112_IC7_PIN32  (1 unrouted)
N$LEDB113_IC8_PIN4  (1 unrouted)
N$LEDB114_IC8_PIN10  (1 unrouted)
N$LEDB115_IC8_PIN16  (1 unrouted)
N$LEDB116_IC8_PIN22  (1 unrouted)
N$LEDB117_IC8_PIN7  (1 unrouted)
N$LEDB118_IC8_PIN13  (1 unrouted)
N$LEDB119_IC8_PIN19  (1 unrouted)
N$LEDB120_IC8_PIN25  (1 unrouted)
N$LEDG1_IC1_PIN6  (1 unrouted)
N$LEDG2_IC1_PIN12  (1 unrouted)
N$LEDG3_IC1_PIN18  (1 unrouted)
N$LEDG4_IC1_PIN24  (1 unrouted)
N$LEDG5_IC1_PIN9  (1 unrouted)
N$LEDG6_IC1_PIN15  (1 unrouted)
N$LEDG7_IC1_PIN21  (1 unrouted)
N$LEDG8_IC1_PIN27  (1 unrouted)
N$LEDG9_IC1_PIN51  (1 unrouted)
N$LEDG10_IC1_PIN45  (1 unrouted)
N$LEDG11_IC1_PIN39  (1 unrouted)
N$LEDG12_IC1_PIN33  (1 unrouted)
N$LEDG13_IC1_PIN48  (1 unrouted)
N$LEDG14_IC1_PIN42  (1 unrouted)
N$LEDG15_IC1_PIN36  (1 unrouted)
N$LEDG16_IC1_PIN30  (1 unrouted)
N$LEDG17_IC2_PIN6  (1 unrouted)
N$LEDG18_IC2_PIN12  (1 unrouted)
N$LEDG19_IC2_PIN18  (1 unrouted)
N$LEDG20_IC2_PIN24  (1 unrouted)
N$LEDG21_IC2_PIN9  (1 unrouted)
N$LEDG22_IC2_PIN15  (1 unrouted)
N$LEDG23_IC2_PIN21  (1 unrouted)
N$LEDG24_IC2_PIN27  (1 unrouted)
N$LEDG25_IC2_PIN51  (1 unrouted)
N$LEDG26_IC2_PIN45  (1 unrouted)
N$LEDG27_IC2_PIN39  (1 unrouted)
N$LEDG28_IC2_PIN33  (1 unrouted)
N$LEDG29_IC2_PIN48  (1 unrouted)
N$LEDG30_IC2_PIN42  (1 unrouted)
N$LEDG31_IC2_PIN36  (1 unrouted)
N$LEDG32_IC2_PIN30  (1 unrouted)
N$LEDG33_IC3_PIN6  (1 unrouted)
N$LEDG34_IC3_PIN12  (1 unrouted)
N$LEDG35_IC3_PIN18  (1 unrouted)
N$LEDG36_IC3_PIN24  (1 unrouted)
N$LEDG37_IC3_PIN9  (1 unrouted)
N$LEDG38_IC3_PIN15  (1 unrouted)
N$LEDG39_IC3_PIN21  (1 unrouted)
N$LEDG40_IC3_PIN27  (1 unrouted)
N$LEDG41_IC3_PIN51  (1 unrouted)
N$LEDG42_IC3_PIN45  (1 unrouted)
N$LEDG43_IC3_PIN39  (1 unrouted)
N$LEDG44_IC3_PIN33  (1 unrouted)
N$LEDG45_IC3_PIN48  (1 unrouted)
N$LEDG46_IC3_PIN42  (1 unrouted)
N$LEDG47_IC3_PIN36  (1 unrouted)
N$LEDG48_IC3_PIN30  (1 unrouted)
N$LEDG49_IC4_PIN6  (1 unrouted)
N$LEDG50_IC4_PIN12  (1 unrouted)
N$LEDG51_IC4_PIN18  (1 unrouted)
N$LEDG52_IC4_PIN24  (1 unrouted)
N$LEDG53_IC4_PIN9  (1 unrouted)
N$LEDG54_IC4_PIN15  (1 unrouted)
N$LEDG55_IC4_PIN21  (1 unrouted)
N$LEDG56_IC4_PIN27  (1 unrouted)
N$LEDG57_IC4_PIN51  (1 unrouted)
N$LEDG58_IC4_PIN45  (1 unrouted)
N$LEDG59_IC4_PIN39  (1 unrouted)
N$LEDG60_IC4_PIN33  (1 unrouted)
N$LEDG61_IC4_PIN48  (1 unrouted)
N$LEDG62_IC4_PIN42  (1 unrouted)
N$LEDG63_IC4_PIN36  (1 unrouted)
N$LEDG64_IC4_PIN30  (1 unrouted)
N$LEDG65_IC5_PIN6  (1 unrouted)
N$LEDG66_IC5_PIN12  (1 unrouted)
N$LEDG67_IC5_PIN18  (1 unrouted)
N$LEDG68_IC5_PIN24  (1 unrouted)
N$LEDG69_IC5_PIN9  (1 unrouted)
N$LEDG70_IC5_PIN15  (1 unrouted)
N$LEDG71_IC5_PIN21  (1 unrouted)
N$LEDG72_IC5_PIN27  (1 unrouted)
N$LEDG73_IC5_PIN51  (1 unrouted)
N$LEDG74_IC5_PIN45  (1 unrouted)
N$LEDG75_IC5_PIN39  (1 unrouted)
N$LEDG76_IC5_PIN33  (1 unrouted)
N$LEDG77_IC5_PIN48  (1 unrouted)
N$LEDG78_IC5_PIN42  (1 unrouted)
N$LEDG79_IC5_PIN36  (1 unrouted)
N$LEDG80_IC5_PIN30  (1 unrouted)
N$LEDG81_IC6_PIN6  (1 unrouted)
N$LEDG82_IC6_PIN12  (1 unrouted)
N$LEDG83_IC6_PIN18  (1 unrouted)
N$LEDG84_IC6_PIN24  (1 unrouted)
N$LEDG85_IC6_PIN9  (1 unrouted)
N$LEDG86_IC6_PIN15  (1 unrouted)
N$LEDG87_IC6_PIN21  (1 unrouted)
N$LEDG88_IC6_PIN27  (1 unrouted)
N$LEDG89_IC6_PIN51  (1 unrouted)
N$LEDG90_IC6_PIN45  (1 unrouted)
N$LEDG91_IC6_PIN39  (1 unrouted)
N$LEDG92_IC6_PIN33  (1 unrouted)
N$LEDG93_IC6_PIN48  (1 unrouted)
N$LEDG94_IC6_PIN42  (1 unrouted)
N$LEDG95_IC6_PIN36  (1 unrouted)
N$LEDG96_IC6_PIN30  (1 unrouted)
N$LEDG97_IC7_PIN6  (1 unrouted)
N$LEDG98_IC7_PIN12  (1 unrouted)
N$LEDG99_IC7_PIN18  (1 unrouted)
N$LEDG100_IC7_PIN24  (1 unrouted)
N$LEDG101_IC7_PIN9  (1 unrouted)
N$LEDG102_IC7_PIN15  (1 unrouted)
N$LEDG103_IC7_PIN21  (1 unrouted)
N$LEDG104_IC7_PIN27  (1 unrouted)
N$LEDG105_IC7_PIN51  (1 unrouted)
N$LEDG106_IC7_PIN45  (1 unrouted)
N$LEDG107_IC7_PIN39  (1 unrouted)
N$LEDG108_IC7_PIN33  (1 unrouted)
N$LEDG109_IC7_PIN48  (1 unrouted)
N$LEDG110_IC7_PIN42  (1 unrouted)
N$LEDG111_IC7_PIN36  (1 unrouted)
N$LEDG112_IC7_PIN30  (1 unrouted)
N$LEDG113_IC8_PIN6  (1 unrouted)
N$LEDG114_IC8_PIN12  (1 unrouted)
N$LEDG115_IC8_PIN18  (1 unrouted)
N$LEDG116_IC8_PIN24  (1 unrouted)
N$LEDG117_IC8_PIN9  (1 unrouted)
N$LEDG118_IC8_PIN15  (1 unrouted)
N$LEDG119_IC8_PIN21  (1 unrouted)
N$LEDG120_IC8_PIN27  (1 unrouted)
N$LEDR1_IC1_PIN5  (1 unrouted)
N$LEDR2_IC1_PIN11  (1 unrouted)
N$LEDR3_IC1_PIN17  (1 unrouted)
N$LEDR4_IC1_PIN23  (1 unrouted)
N$LEDR5_IC1_PIN8  (1 unrouted)
N$LEDR6_IC1_PIN14  (1 unrouted)
N$LEDR7_IC1_PIN20  (1 unrouted)
N$LEDR8_IC1_PIN26  (1 unrouted)
N$LEDR9_IC1_PIN52  (1 unrouted)
N$LEDR10_IC1_PIN46  (1 unrouted)
N$LEDR11_IC1_PIN40  (1 unrouted)
N$LEDR12_IC1_PIN34  (1 unrouted)
N$LEDR13_IC1_PIN49  (1 unrouted)
N$LEDR14_IC1_PIN43  (1 unrouted)
N$LEDR15_IC1_PIN37  (1 unrouted)
N$LEDR16_IC1_PIN31  (1 unrouted)
N$LEDR17_IC2_PIN5  (1 unrouted)
N$LEDR18_IC2_PIN11  (1 unrouted)
N$LEDR19_IC2_PIN17  (1 unrouted)
N$LEDR20_IC2_PIN23  (1 unrouted)
N$LEDR21_IC2_PIN8  (1 unrouted)
N$LEDR22_IC2_PIN14  (1 unrouted)
N$LEDR23_IC2_PIN20  (1 unrouted)
N$LEDR24_IC2_PIN26  (1 unrouted)
N$LEDR25_IC2_PIN52  (1 unrouted)
N$LEDR26_IC2_PIN46  (1 unrouted)
N$LEDR27_IC2_PIN40  (1 unrouted)
N$LEDR28_IC2_PIN34  (1 unrouted)
N$LEDR29_IC2_PIN49  (1 unrouted)
N$LEDR30_IC2_PIN43  (1 unrouted)
N$LEDR31_IC2_PIN37  (1 unrouted)
N$LEDR32_IC2_PIN31  (1 unrouted)
N$LEDR33_IC3_PIN5  (1 unrouted)
N$LEDR34_IC3_PIN11  (1 unrouted)
N$LEDR35_IC3_PIN17  (1 unrouted)
N$LEDR36_IC3_PIN23  (1 unrouted)
N$LEDR37_IC3_PIN8  (1 unrouted)
N$LEDR38_IC3_PIN14  (1 unrouted)
N$LEDR39_IC3_PIN20  (1 unrouted)
N$LEDR40_IC3_PIN26  (1 unrouted)
N$LEDR41_IC3_PIN52  (1 unrouted)
N$LEDR42_IC3_PIN46  (1 unrouted)
N$LEDR43_IC3_PIN40  (1 unrouted)
N$LEDR44_IC3_PIN34  (1 unrouted)
N$LEDR45_IC3_PIN49  (1 unrouted)
N$LEDR46_IC3_PIN43  (1 unrouted)
N$LEDR47_IC3_PIN37  (1 unrouted)
N$LEDR48_IC3_PIN31  (1 unrouted)
N$LEDR49_IC4_PIN5  (1 unrouted)
N$LEDR50_IC4_PIN11  (1 unrouted)
N$LEDR51_IC4_PIN17  (1 unrouted)
N$LEDR52_IC4_PIN23  (1 unrouted)
N$LEDR53_IC4_PIN8  (1 unrouted)
N$LEDR54_IC4_PIN14  (1 unrouted)
N$LEDR55_IC4_PIN20  (1 unrouted)
N$LEDR56_IC4_PIN26  (1 unrouted)
N$LEDR57_IC4_PIN52  (1 unrouted)
N$LEDR58_IC4_PIN46  (1 unrouted)
N$LEDR59_IC4_PIN40  (1 unrouted)
N$LEDR60_IC4_PIN34  (1 unrouted)
N$LEDR61_IC4_PIN49  (1 unrouted)
N$LEDR62_IC4_PIN43  (1 unrouted)
N$LEDR63_IC4_PIN37  (1 unrouted)
N$LEDR64_IC4_PIN31  (1 unrouted)
N$LEDR65_IC5_PIN5  (1 unrouted)
N$LEDR66_IC5_PIN11  (1 unrouted)
N$LEDR67_IC5_PIN17  (1 unrouted)
N$LEDR68_IC5_PIN23  (1 unrouted)
N$LEDR69_IC5_PIN8  (1 unrouted)
N$LEDR70_IC5_PIN14  (1 unrouted)
N$LEDR71_IC5_PIN20  (1 unrouted)
N$LEDR72_IC5_PIN26  (1 unrouted)
N$LEDR73_IC5_PIN52  (1 unrouted)
N$LEDR74_IC5_PIN46  (1 unrouted)
N$LEDR75_IC5_PIN40  (1 unrouted)
N$LEDR76_IC5_PIN34  (1 unrouted)
N$LEDR77_IC5_PIN49  (1 unrouted)
N$LEDR78_IC5_PIN43  (1 unrouted)
N$LEDR79_IC5_PIN37  (1 unrouted)
N$LEDR80_IC5_PIN31  (1 unrouted)
N$LEDR81_IC6_PIN5  (1 unrouted)
N$LEDR82_IC6_PIN11  (1 unrouted)
N$LEDR83_IC6_PIN17  (1 unrouted)
N$LEDR84_IC6_PIN23  (1 unrouted)
N$LEDR85_IC6_PIN8  (1 unrouted)
N$LEDR86_IC6_PIN14  (1 unrouted)
N$LEDR87_IC6_PIN20  (1 unrouted)
N$LEDR88_IC6_PIN26  (1 unrouted)
N$LEDR89_IC6_PIN52  (1 unrouted)
N$LEDR90_IC6_PIN46  (1 unrouted)
N$LEDR91_IC6_PIN40  (1 unrouted)
N$LEDR92_IC6_PIN34  (1 unrouted)
N$LEDR93_IC6_PIN49  (1 unrouted)
N$LEDR94_IC6_PIN43  (1 unrouted)
N$LEDR95_IC6_PIN37  (1 unrouted)
N$LEDR96_IC6_PIN31  (1 unrouted)
N$LEDR97_IC7_PIN5  (1 unrouted)
N$LEDR98_IC7_PIN11  (1 unrouted)
N$LEDR99_IC7_PIN17  (1 unrouted)
N$LEDR100_IC7_PIN23  (1 unrouted)
N$LEDR101_IC7_PIN8  (1 unrouted)
N$LEDR102_IC7_PIN14  (1 unrouted)
N$LEDR103_IC7_PIN20  (1 unrouted)
N$LEDR104_IC7_PIN26  (1 unrouted)
N$LEDR105_IC7_PIN52  (1 unrouted)
N$LEDR106_IC7_PIN46  (1 unrouted)
N$LEDR107_IC7_PIN40  (1 unrouted)
N$LEDR108_IC7_PIN34  (1 unrouted)
N$LEDR109_IC7_PIN49  (1 unrouted)
N$LEDR110_IC7_PIN43  (1 unrouted)
N$LEDR111_IC7_PIN37  (1 unrouted)
N$LEDR112_IC7_PIN31  (1 unrouted)
N$LEDR113_IC8_PIN5  (1 unrouted)
N$LEDR114_IC8_PIN11  (1 unrouted)
N$LEDR115_IC8_PIN17  (1 unrouted)
N$LEDR116_IC8_PIN23  (1 unrouted)
N$LEDR117_IC8_PIN8  (1 unrouted)
N$LEDR118_IC8_PIN14  (1 unrouted)
N$LEDR119_IC8_PIN20  (1 unrouted)
N$LEDR120_IC8_PIN26  (1 unrouted)
SCLK  (8 unrouted)
SIN_MCU  (8 unrouted)
SOUT1  (8 unrouted)